# Altium PCB IO_Hall_Sensor_SMD_Pcb.PcbDoc
Units mil, origin at the board's own origin, x right, y up, seen from the top; angles counter-clockwise.
Board outline 2834.03 x 742.03 mil, 2 copper layers (Top Layer, Bottom Layer); 22 components, 7 nets, 50 pads, 122 vias.
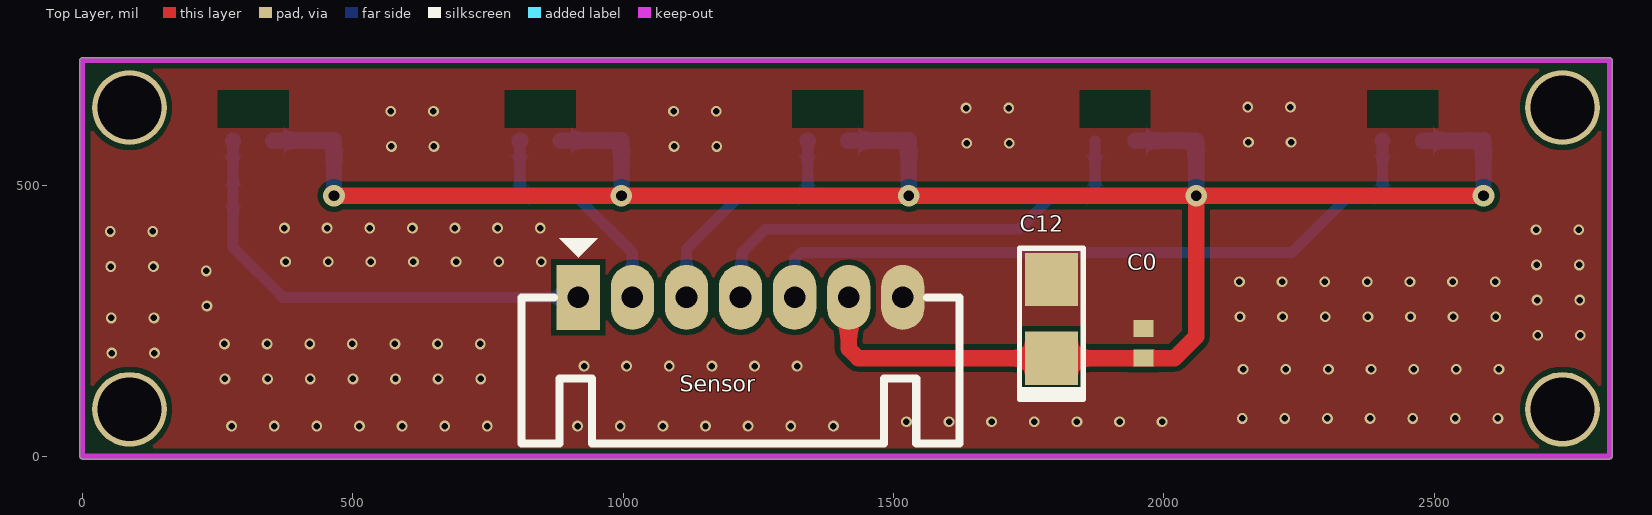
[diagram p0: Top Layer view]
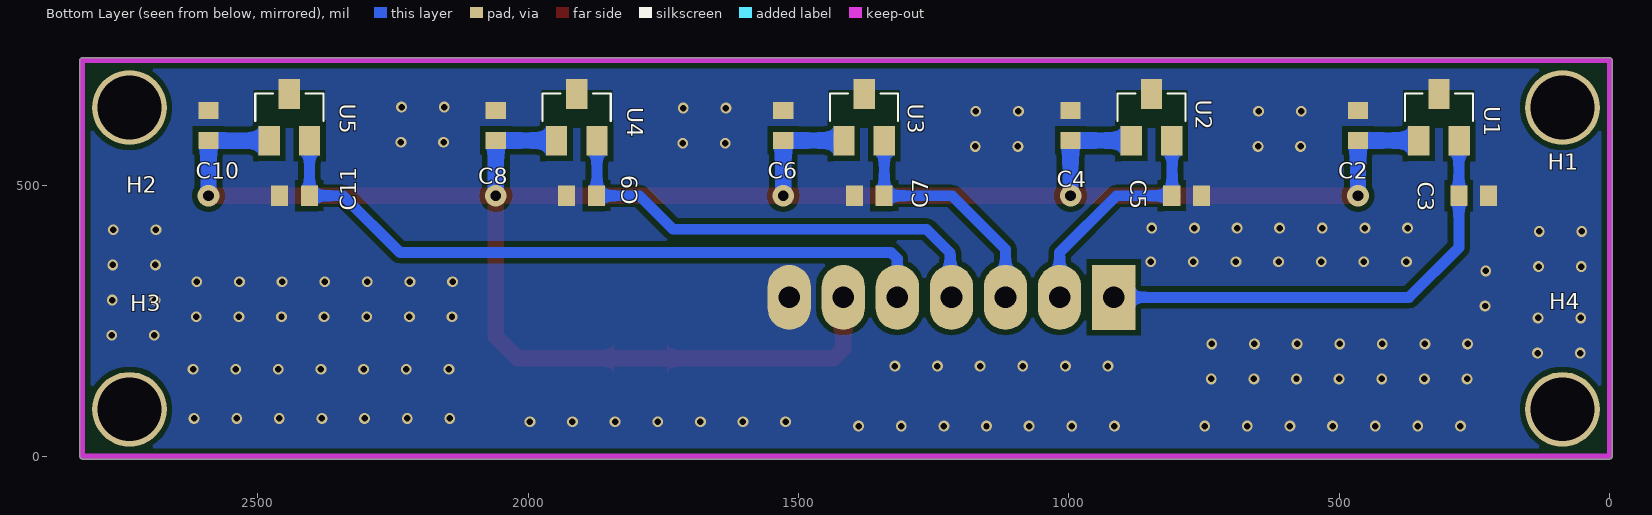
[diagram p1: Bottom Layer view, seen from below]

## Layer stack, top to bottom
Top Solder: solder mask 0.4, Solder Resist, Dk 3.5
Top Layer: signal copper 1.4
Dielectric 1: dielectric 12.6, FR-4, Dk 4.8
Bottom Layer: signal copper 1.4
Bottom Solder: solder mask 0.4, Solder Resist, Dk 3.5

## Board outline
-5.02,0 ccw(c0,0) 0,-5.01 2824,-5.01 ccw(c2824,0) 2829.02,0 2829.02,732 ccw(c2824,732) 2824,737.02 0,737.01 ccw(c0,732) -5.02,732

## Design rules (kind name [scope] priority, off if disabled: settings)
Clearance [All] p1: gap=10 ignorepadtopadclearanceinfootprint=FALSE except(5: Arc-Arc Arc-Track Track-Track; 8: Arc-SMDPad Track-SMDPad; 13: Arc-THPad Track-THPad; 20: Arc-Hole Track-Hole SMDPad-SMDPad SMDPad-Hole THPad-Hole Via-Hole Fill-Hole Poly-Hole Region-Hole Text-Hole)
PolygonConnect [All] p1: connectstyle=Direct reliefconductorwidth=19.68 reliefentries=4 polygonreliefangle="90 Angle" airgapwidth=10
RoutingVias [All] p1: holewidth=28 width=50 viastyle="Through Hole" minholewidth=10 minwidth=10 maxholewidth=39.37 maxwidth=118.11
SolderMaskExpansion [All] p1: expansion=4 istentingtop=FALSE
Width [All] p1: maxlimit=40 minlimit=10 preferedwidth=30 bottomlayer_minwidth=20 minimp=50.000000 maximp=50.000000 favimp=50.000000
30 further rules are at their usual default settings.

## Components (designator, comment, footprint, x,y, rotation, side; value= is the part's Value field where it differs from the comment)
C0 "104" CAP-SM-0603 1962,209 r270 top
C2 "0.1uF" CAP-SM-0603 465.11,612 r90 bottom
C3 "0.1uF" CAP-SM-0603 251,482 r180 bottom
C4 "0.1uF" CAP-SM-0603 996.61,612 r90 bottom
C5 "0.1uF" CAP-SM-0603 782,482 r180 bottom
C6 "0.1uF" CAP-SM-0603 1528.1,612 r90 bottom
C7 "0.1uF" CAP-SM-0603 1369,482 r0 bottom
C8 "0.1uF" CAP-SM-0603 2059.6,612 r90 bottom
C9 "0.1uF" CAP-SM-0603 1901,482 r0 bottom
C10 "0.1uF" CAP-SM-0603 2591.09,612 r90 bottom
C11 "0.1uF" CAP-SM-0603 2432,482 r0 bottom
C12 "100uF" "tu tantalum smd3528" 1792,254 r90 top
H1 "Hole" "LO KHOAN 3MM"#1 284.42,657 r180 bottom
H2 "Hole" "LO KHOAN 3MM"#2 2340.91,935 r180 bottom
H3 "Hole" "LO KHOAN 3MM"#3 2482.05,161.56 r180 bottom
H4 "Hole" "LO KHOAN 3MM"#4 496.55,243.56 r180 bottom
Sensor "Sensor" "Header 7P DC 2.54" 916.96,294 r270 top
U1 "" "SOT 23-3" 315.5,627 r270 bottom
U2 "" "SOT 23-3" 847,627 r270 bottom
U3 "" "SOT 23-3" 1378.5,627 r270 bottom
U4 "" "SOT 23-3" 1909.99,627 r270 bottom
U5 "" "SOT 23-3" 2441.49,627 r270 bottom

## Footprints (in the part's own frame and the unit in brackets; to place one, negate y for a bottom-side part, rotate by r counter-clockwise, add the part's x,y. Pads: shape width x height; smd on the part's side, far side on the other; paste and mask are expansions set on the pad)
CAP-SM-0603 [mm] "SMD Ceramic Capacitor Size 0603"
  rect 0.8x0.95 smd: 1(-0.7,0) 2(0.7,0)
  body extent -0.85,-0.45 0.85,0.45, height 0.6
"Header 7P DC 2.54" [mil]
  rect 120x80 hole 40: 1(0,0.04)
  oval 120x80 hole 40: 2(0,100.04) 3(0,200.04) 4(0,300.04) 5(0,400.04) 6(0,500.04) 7(0,600.04)
  silkscreen extent -110,-105 270,705, body extent -5,-94 271,694, height 237
"LO KHOAN 3MM"#1 [mil]
  round 138 hole 118.1: 1(197.42,-12)
"LO KHOAN 3MM"#2 [mil]
  round 138 hole 118.1: 1(-396.09,-290)
"LO KHOAN 3MM"#3 [mil]
  round 138 hole 118.1: 1(-254.95,-74.56)
"LO KHOAN 3MM"#4 [mil]
  round 138 hole 118.1: 1(409.55,-156.56)
"SOT 23-3" [mm] "Case: SOT23"
  rect 1.4x1 smd paste+0 mask+0.076: 1(1.1,-0.95) 2(1.1,0.95) 3(-1.1,0)
  silkscreen extent -1.12,-1.6 0.18,1.6, body extent -1.5,-1.5 1.5,1.5, height 1.3
"tu tantalum smd3528" [mm]
  rect 2.5x2.5 smd: 1(-1.85,0) 2(1.85,0)
  silkscreen extent -3.78,-1.5 3.33,1.5, body extent -1.85,-1.46 1.85,1.47, height 2.03

## Part data
C0: library part "Tu gom 104 50V", "Cắm", Chung_Loai=Cắm, Don_Vi=Con, Ma_Hang=MH004761, So_Chan=2, Ten_Linh_Kien="Tụ gốm 104 100nF 50V"
C2 C3 C4 C5 C6 C7 C8 C9 C10 C11: library part "Tu 0805 476 6.3V 20%", "Dán", Chung_Loai=Dán, Don_Vi=Con, Ma_Hang=MH004277, So_Chan=2, Ten_Linh_Kien="Tụ 0805 476-47uF 20% 6.3V"
C12: library part "Tu tantalum 100uF 50V SMD7343", "Dán", Chung_Loai=Dán, Don_Vi=Con, Ma_Hang=MH008401, So_Chan=2, Ten_Linh_Kien="Tụ tantalum 107T-100uF 50V SMD7343"
H1 H2 H3 H4: "Hole 3mm"
Sensor: library part "Header 7P 2.54 Duc Cong", "Cắm", Chung_Loai=Cắm, Don_Vi=Con, Ma_Hang=MH004118, Ten_Linh_Kien="Header 7P XH2.54-7P Đực Cong"
U1 U2 U3 U4 U5: library part REG_30V-5V-100mA-1.4W-SOT23-3_2, "Linear Voltage Regulator IC 1 Output 100mA SOT-23-3", Alternate Part Number-1=NA, Case/Package=SOT23-3, Manufacturer="Texas Instruments", Manufacturer Part Number=LM3480IM3-5.0/NOPB, Supplier Part Number-1=LM3480IM3-5.0/NOPB, Supplier-1="CATLOG COMPONENTS"

## Via types
v1: diameter 20, hole 12, Top Layer to Bottom Layer, tented both sides, 117 vias
v2: diameter 40, hole 20, Top Layer to Bottom Layer, tented both sides, 5 vias

## Nets (pads, with @x,y where several pads share a name; then routed paths per layer and width w, separated by ;. In a path a pad name is that pad's centre, name@x,y a point inside that pad or via, vN(x,y) a via of type N, cw(c..) or ccw(c..) an arc to the next point about the centre after c; other vN are vias at no path point)
GND: C0.1 C2.2 C3.2 C4.2 C5.2 C6.2 C7.2 C8.2 C9.2 C10.2 C11.2 C12.2 Sensor.7 U1.3 U2.3 U3.3 U4.3 U5.3
  other v1: 275.67,56 354.5,56 433.33,56 512.17,56 591,56 669.83,56 748.67,56 915.67,56 994.5,56 1073.33,56 1152.17,56 1231,56 1309.83,56 1388.67,56 1523.67,64 1602.5,64 1681.33,64 1760.17,64 1839,64 1917.83,64 1996.67,64 2144.67,70 2223.5,70 2302.33,70 2381.17,70 2460,70 2538.83,70 2617.67,70 263.5,143 342.33,143 421.17,143 500,143 578.83,143 657.67,143 736.5,143 2146.5,161 2225.33,161 2304.17,161 2383,161 2461.83,161 2540.67,161 2619.5,161 927.5,167 1006.33,167 1085.17,167 1164,167 1242.83,167 1321.67,167 54.17,191 133,191 262.5,208 341.33,208 420.17,208 499,208 577.83,208 656.67,208 735.5,208 2691.17,224 2770,224 53.17,256 132,256 2140.67,258 2219.5,258 2298.33,258 2377.17,258 2456,258 2534.83,258 2613.67,258 230,278 2690.17,289 2769,289 2139.67,323 2218.5,323 2297.33,323 2376.17,323 2455,323 2533.83,323 2612.67,323 229,343 52.17,351 131,351 2689.17,354 2768,354 375.5,360 454.33,360 533.17,360 612,360 690.83,360 769.67,360 848.5,360 51.17,416 130,416 2688.17,419 2767,419 373.5,422 452.33,422 531.17,422 610,422 688.83,422 767.67,422 846.5,422 571.17,573 650,573 1094.17,573 1173,573 1635.17,579 1714,579 2156.17,581 2235,581 570.17,638 649,638 1093.17,638 1172,638 1634.17,644 1713,644 2155.17,646 2234,646
SS1: C3.1 Sensor.1 U1.2 | length 874.2
  Bottom Layer w20: U1.2@278.56,583.23 C3.1 278.56,386.44 371,294 Sensor.1
  Bottom Layer w30: U1.2 U1.2@278.56,583.23
SS2: C5.1 Sensor.2 U2.2 | length 436.3
  Bottom Layer w20: C5.1@808.81,482.75 U2.2@808.81,582.91 ; C5.1 912,482 1017,377 Sensor.2
  Bottom Layer w30: C5.1@808.81,482.75 C5.1 ; U2.2@808.81,582.91 U2.2
SS3: C7.1 Sensor.3 U3.2 | length 456.3
  Bottom Layer w20: Sensor.3 1117,383 1216,482 C7.1 ; C7.1@1341.26,482.18 U3.2@1341.26,583.52
  Bottom Layer w30: U3.2 U3.2@1341.26,583.52 ; C7.1@1341.26,482.18 C7.1
SS4: C9.1 Sensor.4 U4.2 | length 890.5
  Bottom Layer w20: Sensor.4@1219.21,296.21 Sensor.4 1217,333 1220,336 1219.21,336.79 1219.21,376.21 1263,420 1732,420 1794,482 C9.1 ; C9.1@1872.58,478.19 U4.2
SS5: C11.1 Sensor.5 U5.2 | length 1313.1
  Bottom Layer w20: Sensor.5 1317,331 1312,336 1317,341 1317,365.28 1328.72,377 2237,377 2342,482 C11.1 ; C11.1@2404.26,482.18 U5.2@2404.26,583.51
  Bottom Layer w30: U5.2 U5.2@2404.26,583.51 ; C11.1@2404.26,482.18 C11.1
VCC: C0.2 C2.1 C4.1 C6.1 C8.1 C10.1 C12.1 Sensor.6 U1.1 U2.1 U3.1 U4.1 U5.1 | length 4265.7
  Top Layer w30: v2(465.11,482) v2(996.61,482) v2(1528.1,482) v2(2059.6,482) ; Sensor.6@1417,334 Sensor.6 1417,199.01 1434.57,181.44 1792,181.44 2019.44,181.44 2059.6,221.6 v2(2059.6,482) ; v2(2591.09,482) v2(2059.6,482)
  Bottom Layer w30: U1.1 353.27,584.07 464.74,584.07 C2.1 v2(465.11,482) ; U2.1 884.77,584.07 996.23,584.07 C4.1 997,584.05 997,482.39 v2(996.61,482) ; U3.1 1416.27,584.07 1524.78,584.07 1525.15,584.44 C6.1 v2(1528.1,482) ; U4.1 1947.76,584.07 2059.22,584.07 2059.6,583.69 2059.6,484.4 2062,482 v2(2059.6,482) ; U5.1 2590.35,583.69 C10.1 v2(2591.09,482)
pads on no net: H1.1 H2.1 H3.1 H4.1

## Polygon pours and split planes (outlines as drawn)
GND on Bottom Layer "GND_L02_P000" (solid, pour order 0): 0,732 2824,732 2824,0 0,0
GND on Top Layer "NONET_L-01_P-001" (solid, pour order 53): 0,732 2824,732 2824,0 0,0

## Keep-outs
Keep-Out Layer:
  lines w10: 0,0 0,732 2824,732 2824,0 0,0

## Other copper
Top Layer:
  pour cut-out: 2376,676.57 2507,676.57 2507,607.57 2376,607.57
  pour cut-out: 1844,676.57 1975,676.57 1975,607.57 1844,607.57
  pour cut-out: 1313,676.57 1444,676.57 1444,607.57 1313,607.57
  pour cut-out: 781,676.57 912,676.57 912,607.57 781,607.57
  pour cut-out: 250,676.57 381,676.57 381,607.57 250,607.57
Bottom Layer:
  pour cut-out: 250,676.57 381,676.57 381,607.57 250,607.57
  pour cut-out: 2376,676.57 2507,676.57 2507,607.57 2376,607.57
  pour cut-out: 1844,676.57 1975,676.57 1975,607.57 1844,607.57
  pour cut-out: 1313,676.57 1444,676.57 1444,607.57 1313,607.57
  pour cut-out: 781,676.57 912,676.57 912,607.57 781,607.57